# Altium PCB tach key h-relay2.PcbDoc
Units mm, origin at the board's own origin, x right, y up, seen from the top; angles counter-clockwise.
Board outline 264.23 x 348.68 mm, 2 copper layers (Top Layer, Bottom Layer); 55 components, 30 nets, 157 pads, 0 vias.
Unrouted connection lines stored in the file: 8.
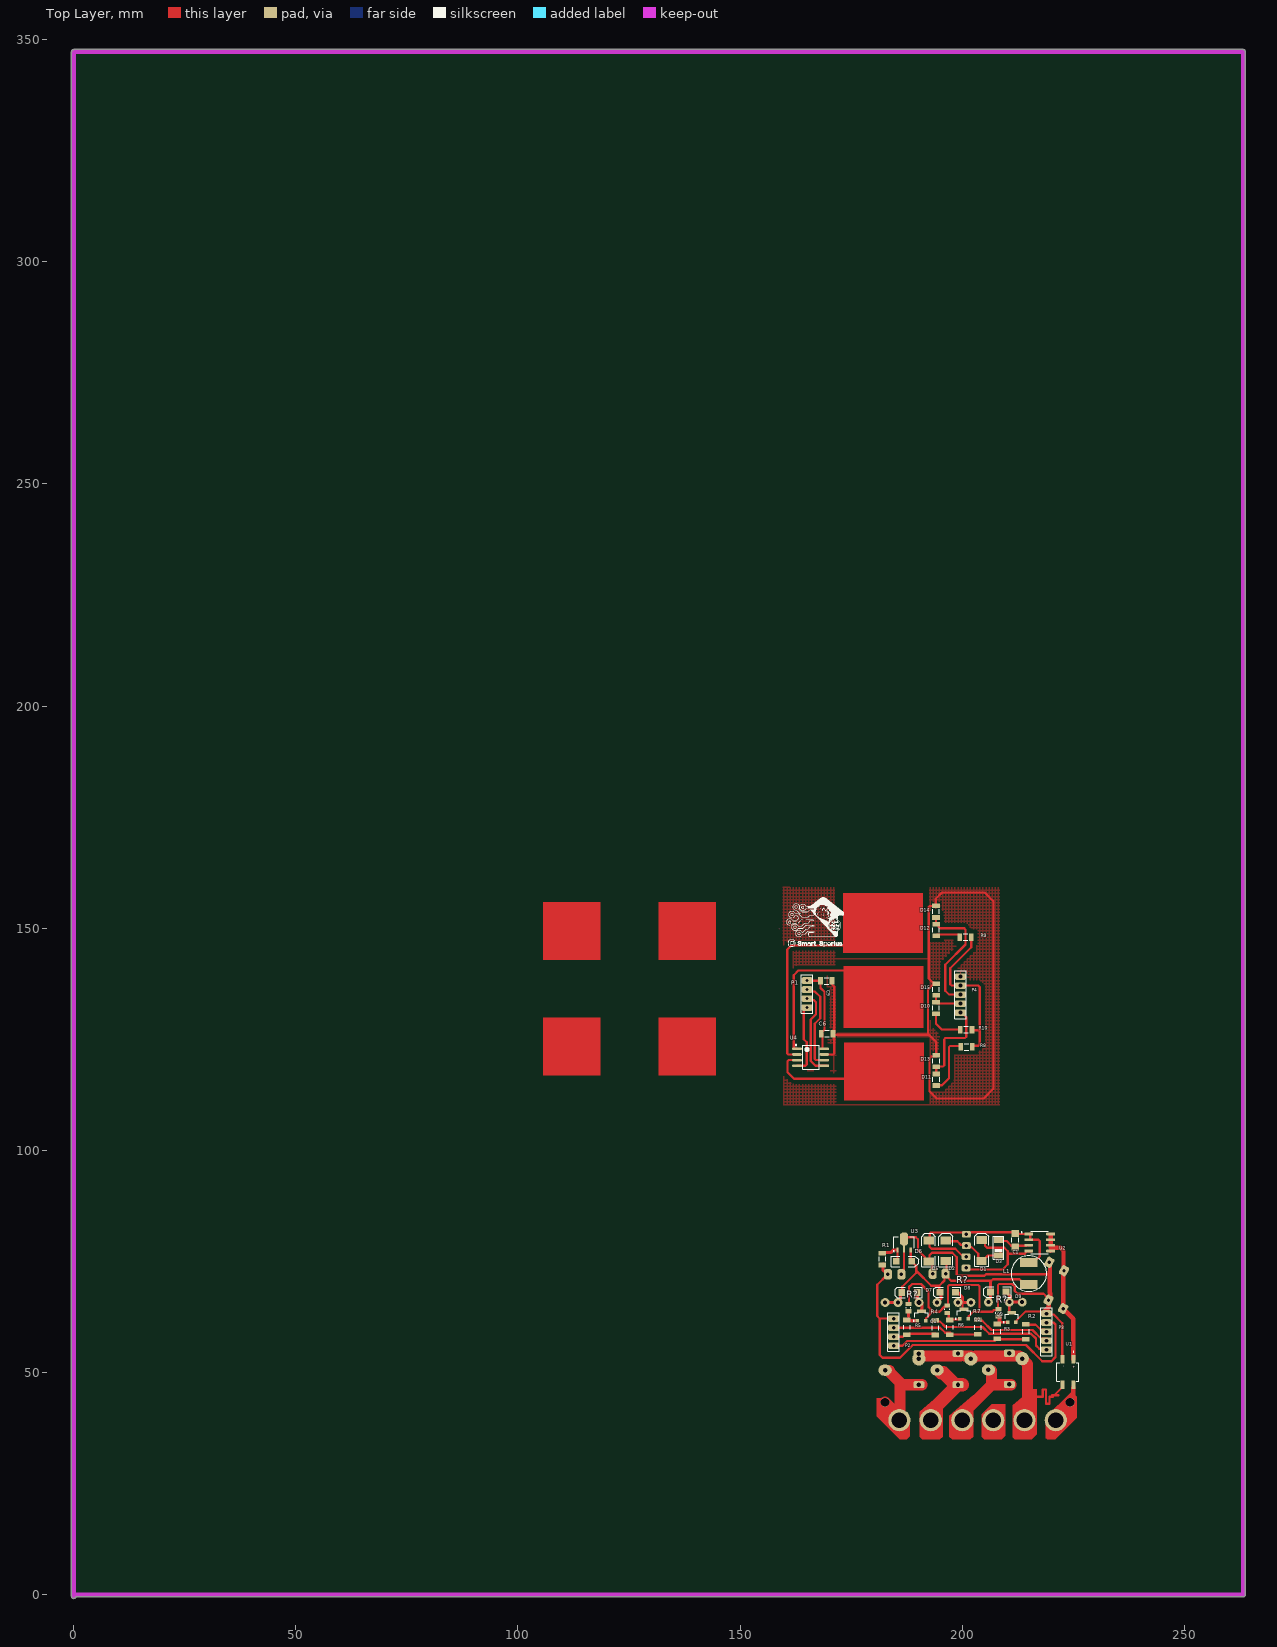
[diagram p0: Top Layer view]
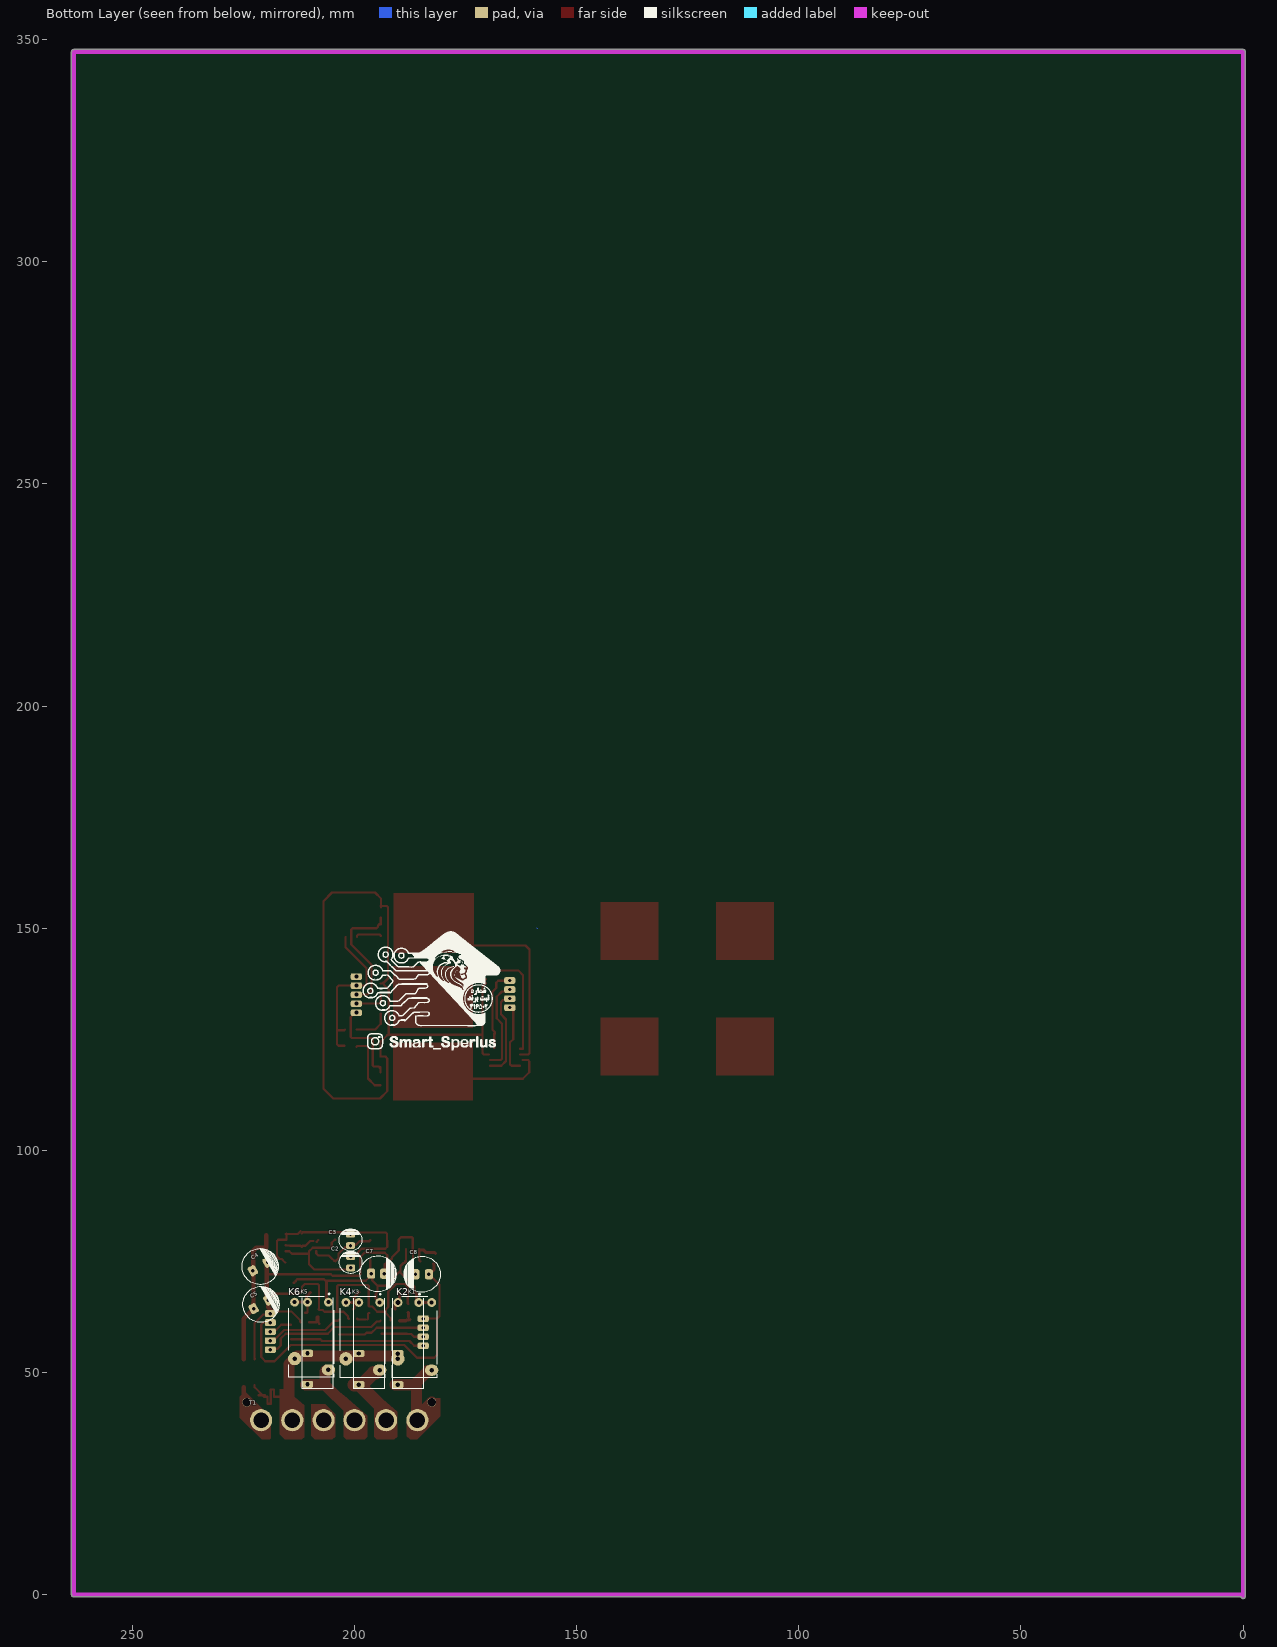
[diagram p1: Bottom Layer view, seen from below]
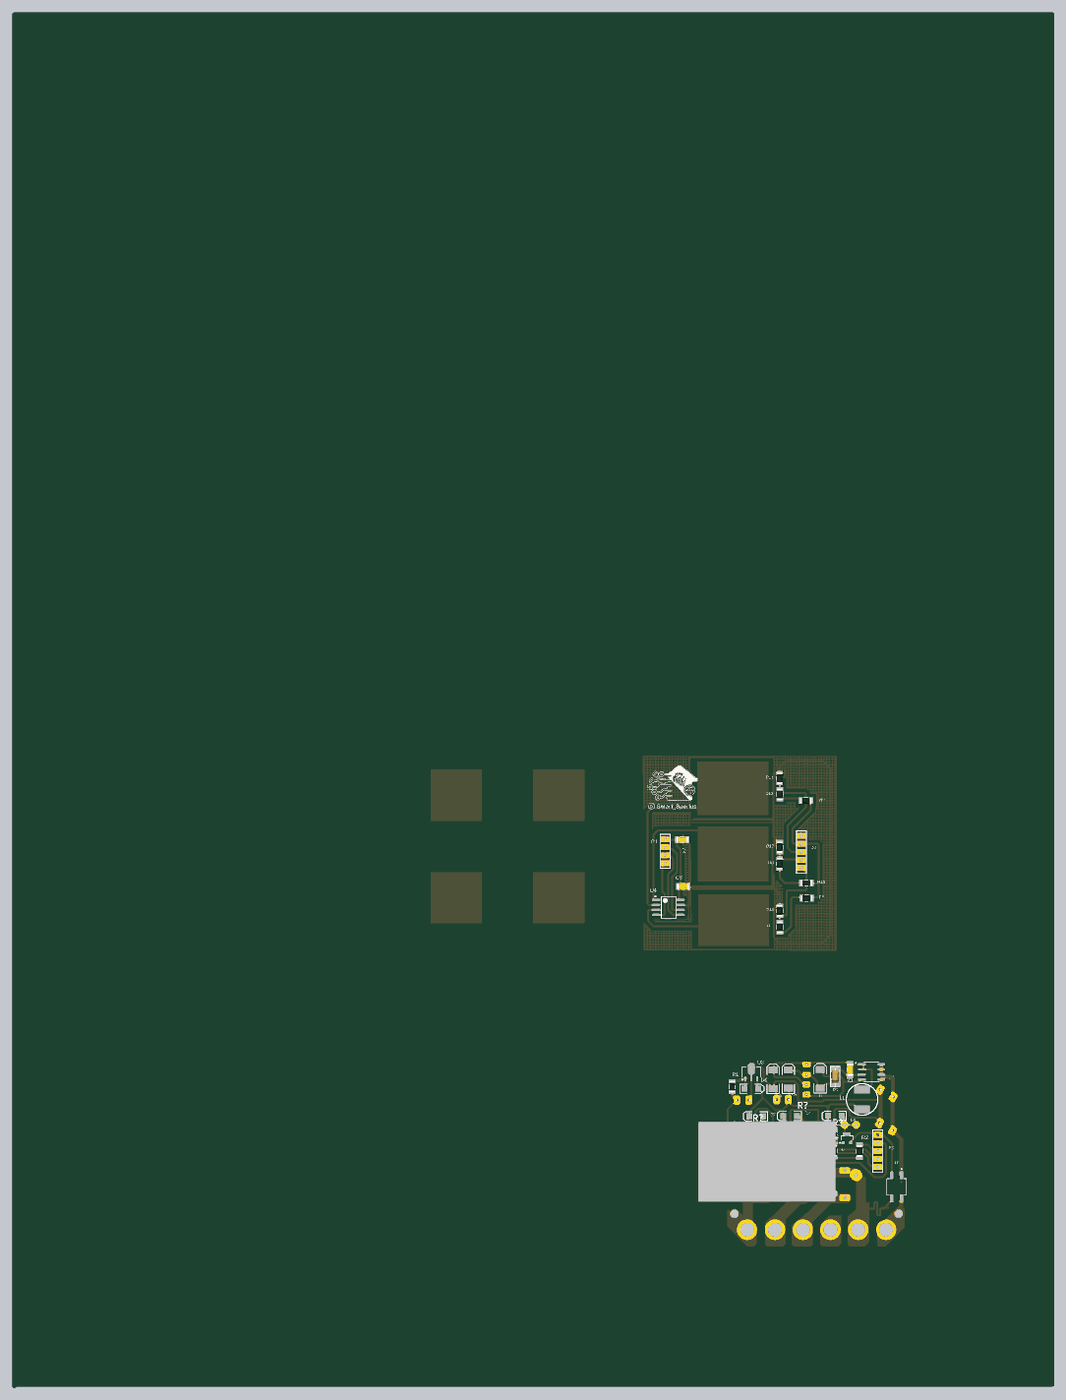
[diagram p2: 3D render of the assembled board from above, using the file's embedded part models]
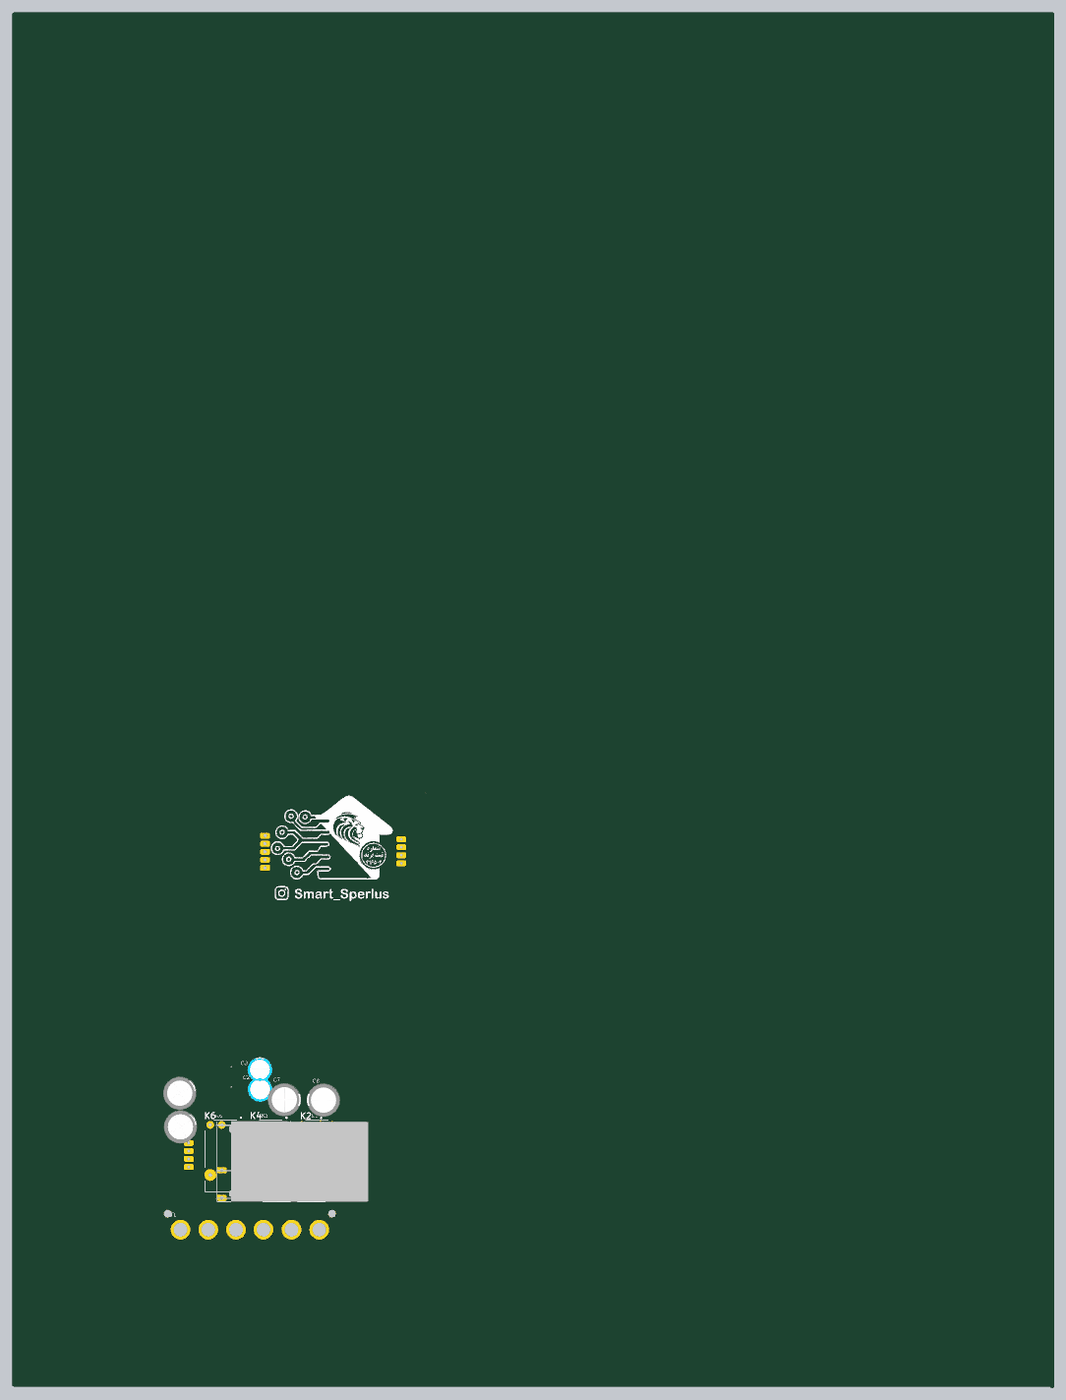
[diagram p3: 3D render of the assembled board from below, using the file's embedded part models]

## Layer stack, top to bottom
Top Solder: solder mask 0.0102, Solder Resist, Dk 3.5
Top Layer: signal copper 0.0356
Dielectric 1: dielectric 0.32, FR-4, Dk 4.8
Bottom Layer: signal copper 0.0356
Bottom Solder: solder mask 0.0102, Solder Resist, Dk 3.5

## Board outline
-0.5,-0.381 -0.5,347.3 cw(c0,347.3) 0,347.8 263.225,347.8 cw(c263.225,347.3) 263.725,347.3 263.725,0 cw(c263.225,0) 263.225,-0.5 0.486,-0.5 cw(c0,-0.381)

## Design rules (kind name [scope] priority, off if disabled: settings)
Clearance Clearance_1 [InPolygon] p1: gap=0.8 ignorepadtopadclearanceinfootprint=FALSE
Clearance [All] p2: gap=0.254 ignorepadtopadclearanceinfootprint=FALSE except(0: Arc-Hole Track-Hole SMDPad-Hole THPad-Hole Via-Hole Fill-Hole Poly-Hole Region-Hole Text-Hole)
PolygonConnect [All] p1: connectstyle=Relief reliefconductorwidth=0.254 reliefentries=4 polygonreliefangle="90 Angle" airgapwidth=0.254
RoomDefinition "tach key h-relay2" [InComponentClass('tach key h-relay2')] p1: confinementstyle=ConfineIn formatcopy=TRUE lockcomponents=FALSE outline 144.907,-4.953 247.904,-4.953 247.904,23.114 144.907,23.114
RoutingLayers [All] p1: top layer_v5=FALSE bottom layer_v5=TRUE
RoutingVias [All] p1: holewidth=0.711 width=2.5 viastyle="Through Hole" minholewidth=0.711 minwidth=1.27 maxholewidth=0.711 maxwidth=2
SolderMaskExpansion [All] p1: expansion=0.102 istentingtop=FALSE
SupplyNets "Schematic Supply Nets_2" [InNet('GND')] p1: voltage=0.000
SupplyNets "Schematic Supply Nets_1" [InNet('+12v')] p2: voltage=0.000
SupplyNets "Schematic Supply Nets" [InNet('vcc')] p3: voltage=0.000
Width [All] p1: maxlimit=3 minlimit=0.5 preferedwidth=1
29 further rules are at their usual default settings.

## Classes and differential pairs
component class "tach key h-relay2": C1 C2 C3 C4 C5 C7 C8 D1 D2 D3 D5 D6 D7 D8 D9 D21 D22 D23 J5 J8 JP? K1 K2 K3 K4 K5 K6 L1 P2 P3 P7 Q1 Q2 Q3 R4 R11 R12 R13 T1 U1 U2 U3 U17

## Components (designator, comment, footprint, x,y, rotation, side; value= is the part's Value field where it differs from the comment)
C1 "=Value" "CAP 1206"#1 211.925,79.775 r90 top
C2 "=Value" ELEC-CAP-RAD10-20 200.875,74.8 r270 bottom
C3 "=Value" ELEC-CAP-RAD10-20 200.925,79.825 r270 bottom
C4 "=Value" ELEC-CAP-RAD15-30#1 221.25,73.853 r330 bottom
C5 "=Value" ELEC-CAP-RAD15-30#1 221.075,65.325 r330 bottom
C6 "=Value" "CAP 1206"#2 169.575,126.275 r0 top
C7 "=Value" ELEC-CAP-RAD15-30#2 194.725,72.2 r0 bottom
C8 "=Value" ELEC-CAP-RAD15-30#3 184.8,72.1 r180 bottom
C9 "=Value" "CAP 1206"#2 169.375,138.15 r0 top
D1 "D Schottky" SMB#1 204.375,77.475 r90 top
D2 "D Schottky" SMB#2 196.3,77.375 r90 top
D3 "Zener Diode" DO-35 208.184,80.582 r270 top
D5 "D Schottky" SMB#3 192.425,77.35 r90 top
D6 "D Tunnel1" 3.2X1.6X1.1 186.9,75 r0 top
D7 "D Tunnel1" 3.2X1.6X1.1 188.125,68 r180 top
D8 "D Tunnel1" 3.2X1.6X1.1 196.75,68.075 r180 top
D9 "D Tunnel1" 3.2X1.6X1.1 208.1,68.1 r180 top
D10 "MODEL" "RES 1206 (3216X08L)"#1 194.1,132.05 r90 top
D11 "MODEL" "RES 1206 (3216X08L)"#1 194.15,115.9 r90 top
D12 "MODEL" "RES 1206 (3216X08L)"#1 194.125,149.6 r90 top
D13 "MODEL" "RES 1206 (3216X08L)"#1 194.15,120.075 r90 top
D14 "MODEL" "RES 1206 (3216X08L)"#1 194.1,153.725 r90 top
D15 "MODEL" "RES 1206 (3216X08L)"#1 194.125,136.225 r90 top
K1 "1-1721081-2" TE_1-1721081-2#1 187.9,56.5 r270 bottom
K2 "2071508-1" RELAY_2071508-1 186.45,57.9 r270 bottom
K3 "1-1721081-2" TE_1-1721081-2#2 196.7,56.525 r270 bottom
K4 "2071508-1" RELAY_2071508-1 198.15,57.925 r270 bottom
K5 "1-1721081-2" TE_1-1721081-2#2 208.25,56.575 r270 bottom
K6 "2071508-1" RELAY_2071508-1 209.7,57.975 r270 bottom
L1 "1mH" HS1101 215,72.275 r90 top
P1 "Header 4" HDR1X4#1 165.073,131.366 r90 top
P2 "Header 4" HDR1X4#2 184.555,55.264 r90 top
P3 "Header 5" HDR1X5#1 218.972,54.121 r90 top
P4 "Header 5" HDR1X5#2 199.617,129.969 r90 top
Q1 "QNPN" SOT-23B_L 190.85,62.725 r90 top
Q2 "QNPN" SOT-23B_L 200.375,63.15 r90 top
Q3 "QNPN" SOT-23B_L 211.15,62.375 r90 top
R1 "10K" "RES 1206 (3216X08L)"#1 182.025,75.5 r90 top
R2 "10K" "RES 1206 (3216X08L)"#2 214.325,59.2 r270 top
R3 "10K" "RES 1206 (3216X08L)"#3 207.875,59.25 r270 top
R4 "10K" "RES 1206 (3216X08L)"#4 193.975,60 r270 top
R5 "10K" "RES 1206 (3216X08L)"#3 187.55,60.175 r270 top
R6 "10K" "RES 1206 (3216X08L)"#3 197.225,60.175 r270 top
R7 "10K" "RES 1206 (3216X08L)"#4 203.525,60.125 r270 top
R8 "10K" "RES 1206 (3216X08L)"#1 200.95,123.3 r0 top
R9 "10K" "RES 1206 (3216X08L)"#1 200.76,148.003 r0 top
R10 "10K" "RES 1206 (3216X08L)"#1 200.887,127.175 r0 top
R? "10K" "RES 0805 (2012X06L)" 196.625,64.25 r90 top
R? "10K" "RES 0805 (2012X06L)" 208.15,63.425 r90 top
R? "10K" "RES 0805 (2012X06L)" 187.9,64.6 r90 top
T1 "Phoenix terminal" "phoenix terminal 6" 219.916,27.579 r180 bottom
U1 "MB6S" SOIC245P670X270-4N 223.775,50.1 r270 top
U2 "HT7A6312" SOIC127P599X175-8N 217.425,79.25 r0 top
U3 "LM1117MP-3.3" SOT89L 186.925,79.25 r90 top
U4 "ATtiny15L-1SC" 8S2_N 165.975,120.95 r0 top

## Footprints (in the part's own frame and the unit in brackets; to place one, negate y for a bottom-side part, rotate by r counter-clockwise, add the part's x,y. Pads: shape width x height; smd on the part's side, far side on the other; paste and mask are expansions set on the pad)
3.2X1.6X1.1 [mm] "SMT LED; 2 Flat Leads"
  rect 1.5x1.5 smd: 1(-1.75,0) 2(1.75,0)
  silkscreen extent -2.9,-1.15 3.27,1.15
8S2_N [mm] "SOP, 8-Leads, Body 5.3x5.3mm, Pitch 1.27mm, IPC Medium Density"
  oval 2.2x0.6 smd: 1(-3.175,1.905) 2(-3.175,0.635) 3(-3.175,-0.635) 4(-3.175,-1.905) 5(2.975,-1.905) 6(2.975,-0.635) 7(2.975,0.635) 8(2.975,1.905)
  silkscreen extent -3.52,-2.75 1.9,2.88, body extent -2.73,-2.75 2.73,2.75, height 2.16
"CAP 1206"#1 [mm]
  rect 1.5x1.7 smd: 1(-1.524,0) 2(1.524,0)
  silkscreen extent -0.47,-0.75 0.53,0.75, body extent -1.49,-0.77 1.55,0.75, height 0.75
"CAP 1206"#2 [mm]
  rect 1.05x1.7 smd: 1(-1.27,0) 2(1.326,0)
  silkscreen extent -0.47,-0.75 0.53,0.75, body extent -1.49,-0.77 1.55,0.75, height 0.75
DO-35 [mm]
  rect 1.397x2 smd: 1(0.765,-0.027) 2(4.265,-0.027)
  silkscreen extent -0.07,-1.2 5.15,1.15, body extent -0.17,-0.81 5.35,0.84, height 1.81
ELEC-CAP-RAD10-20 [mil]
  rrect50% 60x80 hole 30: 1(-50,0) 2(50,0)
  silkscreen extent -100,-100 100,100, body extent -124,-124 124,124, height 404
ELEC-CAP-RAD15-30#1 [mil]
  rrect50% 70x90 hole 30: 1(-75,0) 2(75,0)
  silkscreen extent -160,-160 160,160, body extent -167,-167 167,167, height 609
ELEC-CAP-RAD15-30#2 [mil]
  rrect50% 70x90 hole 30: 1(-54.13,-0.98) 2(61.02,-1.97)
  silkscreen extent -160,-160 160,160, body extent -167,-167 167,167, height 609
ELEC-CAP-RAD15-30#3 [mil]
  rrect50% 70x90 hole 30: 1(-59.06,0) 2(60.04,0)
  silkscreen extent -160,-160 160,160, body extent -167,-167 167,167, height 609
HDR1X4#1 [mm] "Connector; Header; 4 Position"
  rrect50% 1.5x2.5 hole 0.7: 1(0.762,0) 2(2.794,0) 3(4.826,0) 4(6.858,0)
  silkscreen extent -0.51,-1.27 8.13,1.27
HDR1X4#2 [mm] "Connector; Header; 4 Position"
  rrect50% 1.5x2.5 hole 0.8: 1(0.762,0) 2(2.794,0) 3(4.826,0) 4(6.858,0)
  silkscreen extent -0.51,-1.27 8.13,1.27
HDR1X5#1 [mm] "Connector; Header; 5 Position"
  rrect50% 1.5x2.5 hole 0.8: 1(1.016,0) 2(3.048,0) 3(5.08,0) 4(7.112,0) 5(9.144,0)
  silkscreen extent -0.38,-1.27 10.41,1.27
HDR1X5#2 [mm] "Connector; Header; 5 Position"
  rrect50% 1.5x2.5 hole 0.9: 1(1.016,0) 2(3.048,0) 3(5.08,0) 4(7.112,0) 5(9.144,0)
  silkscreen extent -0.38,-1.27 10.41,1.27
HS1101 [mm] "HUMIDITY SENSOR"
  rect 2x4 smd: 1(2.5,0) 2(-2.5,0)
  silkscreen extent -4,-4 4,4
"phoenix terminal 6" [mm] "6 terminals"
  round 5 hole 3.5: 1(-1.143,11.684) 2(5.897,11.684) 3(12.937,11.684) 4(19.897,11.684) 5(26.997,11.684) 6(34.057,11.684)
RELAY_2071508-1 [mm]
  round 2 hole 0.9: 1(-7.85,3.8) 2(-7.85,-3.8)
  oval 2.5x3 hole 1: 3(7.39,3.8)
  round 3 hole 1: 4(4.85,-3.8)
  silkscreen extent -9.1,-5.1 9.1,5.1
"RES 0805 (2012X06L)" [mm] "Chip Resistor, 2-Leads, Body 2.0x1.3mm, IPC High Density _ (0.100 W)"
  rect 0.95x1.3 smd: 1(-0.838,0) 2(0.812,0)
  silkscreen extent -0.16,-0.55 0.14,0.55, body extent -1.03,-0.63 1,0.64, height 0.6
"RES 1206 (3216X08L)"#1 [mm] "Chip Resistor, 2-Leads, Body 3.2x1.6mm, IPC High Density _ (0.125 W)"
  rect 1.05x1.7 smd: 1(-1.295,0) 2(1.301,0)
  silkscreen extent -0.5,-0.75 0.5,0.75, body extent -1.52,-0.76 1.53,0.76, height 0.6
"RES 1206 (3216X08L)"#2 [mm] "Chip Resistor, 2-Leads, Body 3.2x1.6mm, IPC High Density _ (0.125 W)"
  rect 1.05x1.7 smd: 1(-1.675,0) 2(1.7,0)
  silkscreen extent -0.5,-0.75 0.5,0.75, body extent -1.52,-0.76 1.53,0.76, height 0.6
"RES 1206 (3216X08L)"#3 [mm] "Chip Resistor, 2-Leads, Body 3.2x1.6mm, IPC High Density _ (0.125 W)"
  rect 1.05x1.7 smd: 1(-1.651,0) 2(1.651,0)
  silkscreen extent -0.5,-0.75 0.5,0.75, body extent -1.52,-0.76 1.53,0.76, height 0.6
"RES 1206 (3216X08L)"#4 [mm] "Chip Resistor, 2-Leads, Body 3.2x1.6mm, IPC High Density _ (0.125 W)"
  rect 1.05x1.7 smd: 1(-1.775,0) 2(1.55,0)
  silkscreen extent -0.5,-0.75 0.5,0.75, body extent -1.52,-0.76 1.53,0.76, height 0.6
SMB#1 [mm] "DO-214-AA/SMB; 2 C-Bend Leads; Body 5.3 x 3.6 mm, inc. leads (LxW)"
  rect 1.8x2.3 smd: 1(-2.35,0.025) 2(2.375,0)
  silkscreen extent -3.6,-1.55 3.9,1.55
SMB#2 [mm] "DO-214-AA/SMB; 2 C-Bend Leads; Body 5.3 x 3.6 mm, inc. leads (LxW)"
  rect 1.8x2.3 smd: 1(-2.254,0) 2(2.371,0.025)
  silkscreen extent -3.58,-1.55 3.95,1.55
SMB#3 [mm] "DO-214-AA/SMB; 2 C-Bend Leads; Body 5.3 x 3.6 mm, inc. leads (LxW)"
  rect 1.8x2.3 smd: 1(-2.325,-0.05) 2(2.375,-0.025)
  silkscreen extent -3.57,-1.55 3.95,1.55
SOIC127P599X175-8N [mm]
  rrect25% 1.97x0.6 smd: 1(-2.47,1.905) 2(-2.47,0.635) 3(-2.47,-0.635) 4(-2.47,-1.905) 5(2.47,-1.905) 6(2.47,-0.635) 7(2.47,0.635) 8(2.47,1.905)
  silkscreen extent -4.14,-2.52 1.95,2.52
SOIC245P670X270-4N [mm]
  rrect23% 1.91x0.91 smd: 1(-2.9,1.225) 2(-2.9,-1.225) 3(2.9,-1.225) 4(2.9,1.225)
  silkscreen extent -4.68,-2.48 2.1,2.48
SOT89L [mm] "SOT89, 3-Leads, Body 4.5x2.4 mm, Pitch 1.5mm, Lead Span 4.1mm, IPC High Density"
  rect 1.2x0.5 smd: 1(-1.7,1.5) 3(-1.7,-1.5)
  rect 1.6x0.5 smd: 2(-1.5,0)
  oct 3x1.8 smd: 2(0.8,0)
  silkscreen extent -2.07,-2.3 1.3,2.42, body extent -1.3,-2.3 1.3,2.3, height 1.6
SOT-23B_L [mm] "SOT23, 3-Leads, Body 2.9x1.3mm, Pitch 0.95mm, Lead Span 2.4mm, IPC High Density"
  rect 0.85x0.8 smd: 1(-1.075,0.95) 2(-1.075,-0.95)
  rect 0.85x2 smd: 3(1.075,0)
  silkscreen extent -1.2,-1.5 0.7,1.92, body extent -0.7,-1.5 0.7,1.5, height 1.14
TE_1-1721081-2#1 [mm]
  round 2 hole 0.9 mask+0.102: 1(-9.25,2.35)
  round 1.65 hole 1.1 mask+0.102: 2(-9.25,-2.35)
  rrect50% 1.6x2.5 hole 1 mask+0.102: 3(2.25,-2.35) 4(9.25,-2.35)
  silkscreen extent -11.24,-3.5 10.2,3.5, body extent -10.2,-3.9 10.2,14.5, height 3.5
TE_1-1721081-2#2 [mm]
  round 2 hole 0.9 mask+0.102: 1(-9.25,2.35) 2(-9.25,-2.35)
  rrect50% 1.6x2.5 hole 1 mask+0.102: 3(2.25,-2.35) 4(9.25,-2.35)
  silkscreen extent -11.24,-3.5 10.2,3.5, body extent -10.2,-3.9 10.2,14.5, height 3.5

## Part data
C1 C6 C9: library part Capacitor, "Capacitor"
C2 C3 C4 C5 C7 C8: library part "Capacitor Electrolytic", "Electrolytic Capacitor"
D1 D2 D5: "Schottky Diode", Code_JEDEC=DO-214-AA, LatestRevisionDate=17-Jul-2002, LatestRevisionNote="Re-released for DXP Platform.", PackageDescription="DO-214-AA/SMB; 2 C-Bend Leads; Body 5.3 x 3.6 mm, inc. leads (LxW)", PackageReference=SMB, Published=8-Jun-2000, Publisher="Altium Limited", Simulation ModelName=SKYDIODE, Simulation PortMap=(1:1),(2:2)
D6 D7 D8 D9: "Tunnel Diode - RLC Model", LatestRevisionDate=17-Jul-2002, LatestRevisionNote="Re-released for DXP Platform.", PackageDescription="SM LED; 2 Flat Leads", PackageReference=3.2X1.6X1.1, PackageVersion=Feb-2002, Published=8-Jun-2000, Publisher="Altium Limited", Simulation ModelName=DTUNNEL1, Simulation PortMap=(1:1),(2:2)
D10 D11 D12 D13 D14 D15: library part "LED 5mm", "Typical LED", COLOR=RED
K1 K3 K5: "General Purpose Relay SPST-NO (1 Form A) 12VDC Coil Through Hole", Package=None, Check_prices=https://www.snapeda.com/parts/1-1721081-2/TE+Connectivity+Potter+%2526+Brumfield+Relays/view-part/?ref=eda, MF="TE Connectivity", MP=1-1721081-2, SnapEDA_Link=https://www.snapeda.com/parts/1-1721081-2/TE+Connectivity+Potter+%2526+Brumfield+Relays/view-part/?ref=snap
K2 K4 K6: "Power Relay 5VDC 10A SPST-NO(18.2mm 10.2mm 15.2mm) THT", Package=Package, Availability=Unavailable, MF="TE Connectivity", MP=2071508-1, Price=None, SnapEDA_Link=https://www.snapeda.com/parts/2071508-1/TE%20Connectivity/view-part/4717165/?ref=snap
L1: library part Inductor, "Inductor", Code_IEC=1005, Code_JEITA=0402, LatestRevisionDate=17-Jul-2002, LatestRevisionNote="Re-released for DXP Platform.", PackageReference=0402-A, Published=8-Jun-2000, Publisher="Altium Limited", Simulation ModelName=INDUCTOR, Simulation PortMap=(1:1),(2:2)
P1 P2: "Header, 4-Pin", LatestRevisionDate=17-Jul-2002, LatestRevisionNote="Re-released for DXP Platform.", Publisher="Altium Limited"
P3 P4: "Header, 5-Pin", LatestRevisionDate=17-Jul-2002, LatestRevisionNote="Re-released for DXP Platform.", Publisher="Altium Limited"
Q1 Q2 Q3: "NPN Bipolar Transistor", LatestRevisionDate=29-May-2009, LatestRevisionNote="IPC-7351 Footprint Added.", PackageDescription="3-Pin SOT-23 Package 0.95 mm Pitch, 2.4 mm Lead Span", PackageReference=SOT-23B, PackageVersion=Aug-1999, Published=8-Jun-2000, Publisher="Altium Limited", Simulation ModelName=QNPN, Simulation PortMap=(1:1),(2:2),(3:3)
R1 R2 R3 R4 R5 R6 R7 R8 R9 R10 R? R? R?: library part Resistor, "Resistor", Power="1/4 W", Tolerance=5%, Simulation ModelName="Model Name", Simulation PortMap=(1:1),(2:2)
T1: library part "Phoenix terminal 6", "Terminal 6 Pin", ComponentLinkURL=www.picpars.com, Designer="Seyed Mohsen Ghasemain", E-mail=picpars@gmail.com
U1: "Bridge Rectifier Single Phase Standard 600V Surface Mount 4-SOIC", Package="BESOP-4 Surge Components", Digi-Key_Part_Number=MB6SCT-ND, Digi-Key_Purchase_URL=https://www.digikey.com.tr/product-detail/en/on-semiconductor/MB6S/MB6SCT-ND/965654?utm_source=snapeda&utm_medium=aggregator&utm_campaign=symbol, MF="ON Semiconductor", MP=MB6S, SnapEDA_Link=https://www.snapeda.com/parts/MB6S/ON%20Semiconductor/view-part/2774209/?ref=snap
U2: library part Component_1
U3: "800mA Low-Dropout Linear Regulator", DigiKeyPartNumber=LM1117MP-3.3CT-ND, Manufacturer="National Semiconductor", PackageTopMarking=XYTT*N05A, PowerWise=N, Code_IPC=SOT223-4, Code_JEDEC=TO-261-AA, ComponentLink1Description="LM1117 Datasheet", ComponentLink1URL=http://www.national.com/ds/LM/LM1117.pdf, ComponentLink2Description="LM1117 Web Page", ComponentLink2URL=http://www.national.com/pf/LM/LM1117.html, ComponentLink3Description="MP04A Package Page", ComponentLink3URL=http://www.national.com/packaging/folders/mp04a.html, CompType="LDO IC", DatasheetVersion=Apr-2006, PackageDescription="Molded SOT-223, 6.50 x 3.56 x 1.6mm Body, 4 Lead, 2.3mm Pitch", PackageReference=MP04A, PackageVersion="revB, Apr-2003", PartNumber=LM1117MP-3.3, PinCount=4, Published=4-Dec-2008, Publisher="Altium Limited", RoHS=O
U4: "8-Bit AVR Microcontroller with 1K Byte of Flash Memory", Supplier Part Number 1=ATTINY15L-1SC-ND, ComponentLink1Description=Datasheet, ComponentLink1URL=http://www.atmel.com/dyn/resources/prod_documents/doc1187.pdf, ComponentLink2Description="Atmel.com Home", ComponentLink2URL=http://www.atmel.com, DatasheetVersion=1187E-AVR-06/02, LatestRevisionDate=16-Oct-2006, LatestRevisionNote="IPC-7351 Footprint Added.", PackageDescription="8-Lead, 0.208\" Body, Plastic Small Outline Package (EIAJ)", PackageReference=8S2, PackageVersion="revF, Apr-2008", Published=17-Sep-2003, Publisher="Altium Limited", Supplier 1=Digi-Key, Supplier 2=Mouser, Supplier Part Number 2=556-ATTINY15L1SC
D3: MODEL=1N

## Free pads (board coordinates)
  round 2 hole 2: 156(182.625,43.3) 157(224.275,43.3)

## Nets (pads, with @x,y where several pads share a name; then routed paths per layer and width w, separated by ;. In a path a pad name is that pad's centre, name@x,y a point inside that pad or via, vN(x,y) a via of type N, cw(c..) or ccw(c..) an arc to the next point about the centre after c; other vN are vias at no path point)
+12v: C7.2 D2.1 D6.2 D7.2 D8.2 D9.2 K1.1 K2.1 K3.1 K4.1 K5.1 K6.1 L1.2 U3.3 | length 56.9
  Top Layer w0.5: K1.1@186.225,65.725 K1.1@186.225,66.162 ; D7.2 186.525,68.15 186.525,69.325 189.65,72.45 189.65,72.9 ; U3.3@188.425,77.785 U3.3 188.425,75.225 D6.2 ; D6.2@188.5,74.85 188.725,74.625 189,74.625 189.65,73.975 189.65,72.9 ; K4.1@194.025,65.39 195.196,66.56 ; D8.2 194.856,68.219 194.856,69.531 ; C7.2@196.425,71.45 196.425,72.585 196.475,72.636 D2.1@196.475,75.282 ; 206.35,70.45 206.9,71 212.925,71 213.25,70.675 213.25,70.525 213.6,70.175 L1.2@213.75,70.175 ; 206.35,70.65 197.487,70.65 196.731,71.406 196.043,71.406 196.009,71.372 196.009,70.684 194.856,69.531 ; 189.65,72.9 189.825,72.725 193.019,69.531 194.856,69.531
  Top Layer w0.7: K2.1@183.325,65.725 K1.1@185.425,65.725 ; K1.1 186.075,66.275 186.075,67.7 D7.2 ; 195.196,66.56 D8.2@195.196,67.621 ; K6.1@206.35,66.15 D9.2 206.35,70.45
faz: K1.3 K2.4 K3.3 K4.4 K5.3 K6.4 T1.2 U1.3 | length 53
  Top Layer w0.5: 215.67,44.55 217.825,44.55 ; 217.875,44.55 218.125,44.55 218.125,46.163 218.879,46.163 218.879,42.943 219.633,42.943 219.633,44.55 220.2,44.55 ; 220.225,44.85 221.62,44.85 ; 220.4,44.55 222.5,46.65 U1.3@222.5,47.1
  Top Layer w2.5: K1.3@191.4,53.75 K3.3@199.594,53.75 ; 200.581,53.725 K4.4@201.95,53.725 ; K4.4 202.046,53.171 202.399,53.171 202.979,53.75 209.341,53.75 ; K5.3@209.925,53.7 212.916,53.7 214.725,51.891 214.725,41.737 214.497,41.509 214.497,39.741 T1.2 ; T1.2@214.146,37.812 T1.2@214.146,39.263
  Bottom Layer w0.5: K2.4@191.403,52.954 K2.4@191.506,52.851
GND: C4.1 C5.1 C6.2 C7.1 C8.1 C9.2 D5.1 D13.2 D14.2 D15.2 P3.5 P4.5 Q1.2 Q2.2 Q3.2 R?.2 U1.2 U3.2 U4.7 | length 312.4
  Top Layer w0.5: U4.7@169.772,121.587 170.914,121.587 171.172,121.845 ; C9.2@170.426,137.675 171.207,136.894 171.207,121.88 ; C9.2@170.426,138.525 170.701,138.25 C9.2 C9.2@170.701,137.825 ; C6.2@171.257,126.032 192.3,126.032 ; C8.1@186.819,72.586 186.819,73.225 186.88,73.286 186.88,77.234 186.925,77.279 186.925,77.75 186.925,80.05 186.925,80.21 186.88,80.255 187.075,80.45 189.55,80.45 190.075,79.925 190.075,77.475 191.603,75.947 ; R?.2@187.9,65.412 188.025,65.537 188.025,69.225 188.725,69.925 190.7,69.925 192.425,68.2 192.425,64.75 192.938,64.238 192.938,63.288 ; D5.1@191.575,75.675 D5.1@192.35,74.9 ; Q1.2@191.875,61.7 191.875,62.225 192.902,63.252 ; 192.988,63.613 193.05,63.675 194.875,63.675 196.037,64.837 196.625,64.837 196.825,65.037 196.825,69.407 197.118,69.7 203.607,69.7 203.9,69.407 203.9,63.675 ; C7.1@193.225,71.527 193.225,74.375 192.575,75.025 D5.1 192.657,75.207 192.657,76.382 193.2,76.925 197.75,76.925 198.75,75.925 198.75,72.068 199.043,71.775 205,71.775 205.35,72.125 219.738,72.125 219.763,72.125 ; D15.2@193.375,137.251 192.3,136.176 192.3,126.032 ; D14.2@194.029,154.714 D14.2@194.029,155.026 ; D14.2 D14.2@194.029,155.026 ; D15.2 193.65,137.526 193.65,137.676 193.525,137.801 193.375,137.801 192.475,138.701 192.475,154.733 192.768,155.026 D14.2@194.029,155.026 ; Q2.2 201.475,62.225 201.475,62.65 202.5,63.675 203.9,63.675 ; R?.2@208.025,64.237 208.025,69.632 208.318,69.925 211.225,69.925 211.825,69.325 211.825,68.35 212.475,67.7 218.323,67.7 219.036,66.987 219.256,66.987 C5.1@219.256,66.581 ; R?.2@208.15,64.237 207.951,64.038 207.163,64.038 206.8,63.675 203.9,63.675 ; Q3.2 212.25,61.45 212.25,61.725 214.275,63.75 217.679,63.75 217.741,63.688 P3.5@218.549,63.688 ; P3.5@218.575,63.662 P3.5 ; P3.5@219.232,63.525 219.718,63.039 220.586,63.039 222.525,61.1 U1.2@222.525,53.412 ; U1.2 cw(c222.646,53.491) U1.2 222.471,53.016 U1.2@222.55,53.412 ; 192.3,126.032 192.505,126.032 192.505,125.905 192.632,125.905 194.156,124.381 194.156,121.11 194.147,121.101 193.051,121.101 192.632,120.682 192.632,113.332 194.283,111.681 204.824,111.681 207.014,113.871 207.014,156.1 205.078,158.036 195.426,158.036 194.029,156.639 D14.2@194.029,155.026
  Top Layer w1: P3.5@218.575,63.662 218.575,63.799 219.468,64.693 219.468,66.496 C5.1@219.5,66.528 ; C4.1@219.647,74.948 219.647,74.593 219.763,74.478 219.763,72.125 ; C5.1@219.738,66.987 219.834,67.083 219.834,67.801 219.738,67.896 219.738,72.125 219.738,72.675
NetC1_1: C1.1 D3.1 U2.3 | length 7.5
  Top Layer w0.5: D3.1 D3.1@208.536,79.439 ; 209.28,79.575 210,79.575 211.049,78.526 211.65,78.526 C1.1 212.2,78.526 212.8,78.526 212.818,78.544 214.539,78.544 214.567,78.572 215.455,78.572 U2.3@215.505,78.622
NetC1_2: C1.2 C2.1 C3.1 D5.2 L1.1 U2.1 U2.2 | length 44.9
  Top Layer w0.5: C2.1@200.654,76.066 200.234,76.066 198.45,77.85 193.075,77.85 192.65,78.275 192.65,79.7 192.682,79.732 192.682,81.207 192.975,81.5 200.52,81.5 C3.1 201.356,81.526 201.935,81.526 201.984,81.575 211.649,81.575 C1.2 ; C1.2@212.2,81.775 212.813,81.162 U2.1@215.505,81.162 ; U2.1@215.325,81.259 215.325,79.892 217.182,79.892 217.475,79.599 217.475,76.083 216.917,75.525 216.398,75.525 L1.1@215.6,74.727
NetC2_2: C2.2 D1.2 U2.4 | length 25.8
  Top Layer w0.5: C2.2@200.858,73.472 201.13,73.2 209.1,73.2 210.25,74.35 210.25,76.725 ; D1.2 204.493,79.85 205.143,79.2 205.143,78.507 205.575,78.075 209.45,78.075 210.25,77.275 210.25,76.725 ; U2.4@215.571,77.35 215.524,77.302 214.677,77.302 214.1,76.725 210.25,76.725
NetC3_2: C3.2 D1.1 D2.2 D3.2 | length 15.6
  Top Layer w0.5: D2.2@196.475,79.746 196.696,79.525 198.875,79.525 199.727,78.673 200.557,78.673 201.023,78.207 202.118,78.207 203.618,76.707 203.618,75.727 D1.1@204.32,75.025 ; D1.1 204.6,75.125 205.25,75.775 205.792,76.317 D3.2 ; D3.2@208.289,76.435 208.621,76.766 208.621,77.263
NetC4_2: C4.2 C5.2 U1.1 U2.5 U2.6 U2.7 U2.8 | length 32.2
  Top Layer w1: U2.5 220.095,77.545 220.132,77.545 220.132,78.057 222.132,78.057 222.8,77.389 222.8,73.081 222.776,73.057 222.776,72.295 222.772,72.291 222.772,71.654 222.776,71.65 ; 219.895,78.057 U2.6 U2.7 219.895,80.847 ; C4.2@222.751,72.2 222.751,65.569 222.778,65.541 222.778,64.644 C5.2@222.8,64.623 ; C5.2@222.775,64.334 225,62.109 U1.1
NetD7_1: D7.1 K1.2 K2.2 Q1.3 | length 4.3
  Top Layer w0.5: K2.2 190.55,65.75 K2.2@190.6,65.7 ; Q1.3@190.8,64.225 190.925,64.35
  Top Layer w0.7: D7.1 189.875,66.382 190.25,66.007 K2.2 ; 190.925,64.35 K2.2@190.925,65.725
NetD8_1: D8.1 K3.2 K4.2 Q2.3 | length 6.4
  Top Layer w0.5: 200.075,65.775 200.075,64.4 200.25,64.225 Q2.3
  Top Layer w0.7: D8.1@199.007,68.068 200.075,67 200.075,65.775 K4.2
NetD9_1: D9.1 K5.2 K6.2 Q3.3 | length 8.3
  Top Layer w0.5: K5.2 210.6,65.575 210.6,63.625 210.775,63.45 Q3.3
  Top Layer w0.7: D9.1@209.924,68.026 210.805,67.145 K5.2@210.805,65.78 ; K5.2 K6.2
NetD10_1: D10.1 R10.1 | length 8.3
  Top Layer w0.5: D10.1 194.1,128.501 195.426,127.175 R10.1
NetD11_1: D11.1 R8.1 | length 13.3
  Top Layer w0.5: D11.1@194.15,114.575 194.208,114.633 195.457,114.633 197,116.176 197,123.182 197.293,123.475 199.43,123.475 R8.1@199.58,123.325
NetD12_1: D12.1 R9.1 | length 5.9
  Top Layer w0.5: D12.1 194.4,148.58 199.19,148.58 199.465,148.305 R9.1
NetP2_1: P2.1 R2.2 R3.2 | length 30.4
  Top Layer w0.5: P2.1 186.576,56.026 187.625,57.075 207.332,57.075 207.732,57.475 R2.2@214.325,57.475
NetP2_2: P2.2 R4.2 R5.2 | length 9.6
  Top Layer w0.5: P2.2 186.657,58.058 186.95,58.351 186.95,58.375 187.249,58.674 R5.2@188.175,58.674 ; R5.2@188.175,58.725 R4.2@193.916,58.725
NetP2_3: P2.3 R6.2 R7.2 | length 19.6
  Top Layer w0.5: P2.3 195.01,60.09 196.176,58.924 197.3,58.924 197.649,58.575 R7.2
nol: pad.157 T1.1 U1.4 | length 9.8
  Top Layer w1: T1.1 221.664,39.868 222.843,39.868 224.275,41.3 224.275,43.442 224.975,44.142 224.975,46.42 224.98,46.425 U1.4@224.98,46.72
o1: P1.1 P3.1 R4.1 U4.4 | length 43.8
  Top Layer w0.5: U4.4 164.707,119.045 165,119.338 165,124.327 164.311,125.016 164.311,131.384 164.801,131.874 P1.1@164.819,131.874 ; R4.1@194.141,61.675 194.316,61.5 194.95,61.5 196.225,60.225 204.55,60.225 206.054,58.721 215.504,58.721 216.6,57.625 216.6,56.075 217.335,55.34 P3.1@219.044,55.34
o2: P1.2 P3.2 R7.1 U4.5 | length 37.9
  Top Layer w0.5: P1.2@164.819,133.906 164.902,133.823 166.577,133.823 167.067,133.333 167.067,130.642 165.9,129.475 165.9,120.125 166.978,119.047 U4.5@169.489,119.047 ; R7.1@203.45,61.9 203.725,61.625 204.525,61.625 206.6,59.55 215.825,59.55 217.783,57.592 219.17,57.592 P3.2@219.293,57.469
o3: P1.3 P3.3 R2.1 U4.6 | length 26.1
  Top Layer w0.5: P1.3 165.485,135.78 166.82,135.78 168.025,134.575 168.025,129.75 166.8,128.525 166.8,120.629 167.093,120.336 U4.6@169.449,120.336 ; R2.1@214.32,60.75 216.525,60.75 217.651,59.624 218.549,59.624 P3.3
o11: Q1.1 R5.1 R?.1@187.9,63.762 | length 3.5
  Top Layer w0.7: R5.1@187.55,61.952 187.725,61.777 188.333,61.777 188.46,61.65 Q1.1 ; 187.9,62.45 187.9,63.487 R?.1@187.925,63.512
o21: D11.2 D13.1 P4.1 | length 19.9
  Top Layer w0.5: D13.1 194.33,118.6 194.33,118.634 194.545,118.85 195.641,118.85 195.934,119.143 195.934,124.977 196.227,125.27 200.594,125.27 200.887,125.563 200.887,129.969 P4.1@199.871,130.985 ; D11.2@194.156,117.554 D13.1@194.156,118.514
o22: D10.2 D15.1 P4.2 Q2.1 R6.1 R?.1@196.625,63.412 | length 11
  Top Layer w0.5: D10.2 194.375,133.076 199.558,133.076 P4.2 ; D10.2@194.125,133.351 D15.1 ; R?.1@196.625,63.412 196.75,63.412 196.975,63.187 196.975,62.101 197.125,61.951 R6.1@197.225,61.951 ; R6.1@197.575,61.951 199.301,61.951 Q2.1
o23: D12.2 D14.1 P4.3 | length 29.2
  Top Layer w0.5: D14.1@194.125,152.405 D12.2 194.45,150.901 194.725,150.626 194.725,150.301 195.051,149.975 200.467,149.975 200.76,149.682 200.76,146.352 196.2,141.792 196.2,135.925 197.076,135.049 P4.3@200.539,135.049
o33: Q3.1 R3.1 R?.1@208.15,62.587 | length 4.9
  Top Layer w0.5: R3.1@207.944,60.968 208.15,61.174 208.15,62.587 208.325,62.587 208.55,62.362 208.55,61.3 Q3.1
of1: K1.4 K2.3 pad.156 T1.6 | length 20.9
  Top Layer w2.5: pad.156 T1.6@185.1,40.825 ; K2.3@183.325,50.485 183.575,50.485 183.575,50.235 186.025,47.785 186.025,43.4 T1.6@186.025,40.825 ; T1.6 T1.6@185.859,40.825 ; 186.025,47.225 K1.4@190.925,47.225
of2: K3.4 K4.3 T1.5 | length 13.5
  Top Layer w3: 193.775,41.775 193.775,42.05 K3.4@198.956,47.231 ; K4.3@195.25,49.9 195.735,49.9 198.404,47.231 K3.4@200.075,47.231
of3: K5.4 K6.3 T1.4 | length 18.6
  Top Layer w2.5: T1.4 200.019,39.939 201.26,41.181 201.26,41.86 206.625,47.225 ; K6.3@206.325,50.485 206.575,50.485 206.575,50.235 206.625,50.185 206.625,47.225 ; K5.4@211.025,47.225 206.625,47.225
VCC: C6.1 C8.2 C9.1 D6.1 P1.4 P2.4 P3.4 P4.4 R1.1 R1.2 R8.2 R9.2 R10.2 U3.1 U4.8 | length 140.1
  Top Layer w0.5: P1.4 165.127,138.17 167.66,138.17 168.105,137.725 168.105,136.545 168.98,135.67 168.98,127.143 168.687,126.85 168.655,126.85 168.38,126.575 C6.1@168.38,126.25 ; U4.8@168.575,123.112 C6.1@168.575,126.25 ; R1.1@182.3,74.48 R1.1@182.363,74.416 ; C8.2@183.07,72.179 183.07,71.925 180.875,69.73 180.875,62.697 181.45,62.122 ; P2.4 181.45,62.122 ; D6.1 185.425,75.275 U3.1@185.425,77.775 ; R9.2 202.03,147.972 202.03,145.717 197.331,141.018 197.331,137.374 197.624,137.081 P4.4 203.642,137.081 203.935,136.788 203.935,127.048 ; R10.2 202.315,127.048 203.935,127.048 ; R8.2@202.241,123.55 203.642,123.55 203.935,123.843 203.935,127.048 ; P3.4 220.567,61.233 221.017,60.783 221.017,53.467 220.1,52.55 218.025,52.55 214.375,56.2 188.85,56.2 185.975,53.325 182.05,53.325 181.45,53.925 181.45,62.122
  Top Layer w0.7: R1.2@181.8,76.801 181.975,76.976 183.876,76.976 184.435,77.535 185.41,77.535 U3.1 ; R1.1@182.087,74.218 182.138,73.111 ; R1.1@182.138,74.416 182.138,73.111 ; C8.2@183.07,72.179 182.138,73.111
pads on no net: T1.3 U4.1 U4.2 U4.3
copper on no net: | length 112.4
  Top Layer w0.5: 162.215,120.317 160.968,120.317 160.675,120.024 160.675,117.603 162.152,116.126 181.234,116.126 182.727,117.619 ; 162.689,121.587 160.918,121.587 160.625,121.88 160.625,145.206 161.517,146.098 177.922,146.098 183.614,151.79 ; 162.761,122.857 162.144,122.857 162.1,122.901 162.1,139.442 163.168,140.51 174.727,140.51 176.441,138.796 177.201,138.796
  Top Layer w1: 206.999,38.755 206.999,38.905
  Bottom Layer w0.2: 158.825,149.867 158.952,149.994

## Polygon pours and split planes (outlines as drawn)
GND on Top Layer "GND_L01_P-001" (hatched 90Degree grid 0.7 track 0.3, remove dead copper, pour order 0): 159.55,159.225 208.4,159.175 208.425,110.125 208.4,110.125 159.75,110.2

## Keep-outs
Keep-Out Layer:
  lines w1: 0,-0.381 0,347.3 263.225,347.3 263.225,0 0,0

## Other copper
Top Layer:
  rectangle: 105.596,116.89 118.596,129.89
  rectangle: 131.596,142.89 144.596,155.89
  rectangle: 131.596,116.89 144.596,129.89
  rectangle: 105.596,142.89 118.596,155.89
  region: 191.225,144.375 191.225,157.925 173.175,157.925 173.175,144.375
  region: 191.35,111.2 191.35,124.3 173.4,124.3 173.4,111.2
  region: 191.3,127.55 191.3,141.525 173.325,141.525 173.325,127.55
  region net nol: 220.945,34.945 225.83,39.83 225.83,44.57 224.825,45.575 224.525,45.575 218.845,39.895 218.845,35.199 219.099,34.945
  pour cut-out: 171.334,158.925 192.632,158.925 192.632,143.45 171.471,143.45
  pour cut-out: 171.557,125.55 192.759,125.55 192.759,110.411 171.691,110.411
  pour cut-out: 171.407,142.5 192.632,142.5 192.632,126.4 171.549,126.4
  region net of3: 197.128,40.3 197.128,35.58 197.763,34.945 201.827,34.945 202.462,35.58 202.462,44.825
  region net faz: 213.511,34.945 213.638,35.072 213.511,34.945 211.86,34.945 211.352,35.453 211.352,42.573 215.614,46.247 216.813,46.247 216.813,36.088 215.67,34.945 212.495,34.945
  region net of2: 190.397,41.12 190.397,35.58 191.032,34.945 194.969,34.945 195.604,35.58 195.604,44.025 193.65,44.025
  region net of1: 180.745,44.216 180.745,40.105 185.905,34.945 187.476,34.945 188.225,35.694 188.225,39.125 183.134,44.216
  region: 204.367,40.617 204.367,35.58 205.002,34.945 208.939,34.945 209.701,35.707 209.701,42.849 206.599,42.849

## Silkscreen, mask and mechanical layers (free items; w line width, h text height)
Top Overlay:
  drawing of 44 lines, arcs and shapes, not listed
Bottom Overlay:
  drawing of 44 lines, arcs and shapes, not listed
Mechanical 2:
  lines w0.2: 27.686,80.264 160.909,80.264 ; 29.21,77.089 29.21,151.892 ; 41.021,29.972 161.417,29.972 ; 79.375,76.835 79.375,151.892
Mechanical 13:
  lines w0.2: 159.084,109.75 208.915,109.75 208.915,159.545 ; 159.175,109.639 159.175,159.43 208.898,159.466 ; 180.11,77.46 185.25,82.6
  lines w0.254: 180.11,77.46 180.11,40.015 185.942,34.183 221.333,34.183 226.465,39.315 226.465,77.39 226.462,77.388 221.25,82.6 185.25,82.6

## Text inside footprints (layer, text, board x,y; h text height)
U1: Top Overlay "+" at 224.665,51.499 h0.81 r270; Top Overlay "-" at 222.375,51.5 h0.81 r270